# EAGLE board BSS_T10 Underboard component design (EAGLE 6.5.0)
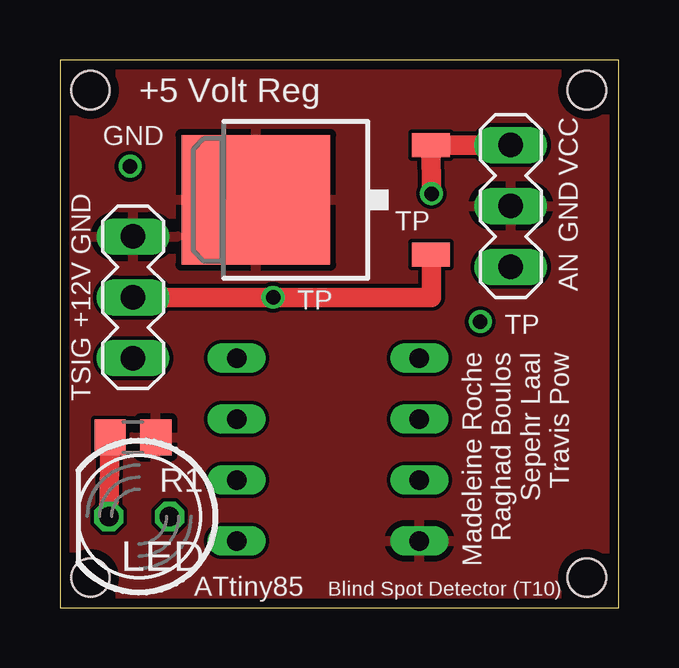
[diagram p0: board, top side]
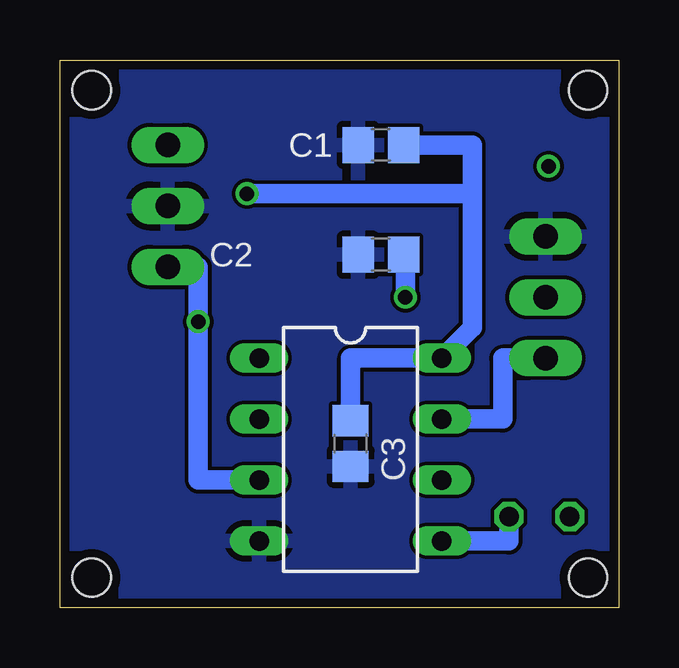
[diagram p1: board, bottom side, seen from below]

Size 23.29 x 22.85 mm. Coordinates in mm from the lower left corner, seen from the top.
Outline: 0,0 23.29,0 23.29,22.85 0,22.85 0,0
Copper layers (1*16): Top 0.0356mm / dielectric 1.5011mm / Bottom 0.0356mm
Design rules "LaenPCBOrder": minimum track width 6mil, minimum drill 13mil, track to track 6mil, track to pad 6mil, pad to pad 6mil, via to via 6mil, smd to smd 6mil, copper to edge 15mil, drill to drill 6mil, minimum pad ring 7mil, minimum via ring 7mil, stop-mask expansion 3mil, vias tented up to drill 0mil, thermal gap 10mil
Holes 1.6 mm at 1.27,1.27 1.27,21.59 21.97,21.59 21.97,1.27

## Footprints (pad centres in the part's own frame; a part is rotated, then mirrored left to right if it is on the bottom)
DIL08 = drill 0.813 long: 1 -3.81,-3.81; 2 -1.27,-3.81; 3 1.27,-3.81; 4 3.81,-3.81; 5 3.81,3.81; 6 1.27,3.81; 7 -1.27,3.81; 8 -3.81,3.81
C0805 = smd 1.3 x 1.5: 1 -0.95,0; 2 0.95,0
TO252 = smd 1 x 1.6: 1 -2.28,-4.8; 2 2.28,-4.8 | smd 5.4 x 6.2: 3 0,2.5
LED5MM = drill 0.813 octagon: A -1.27,0; K 1.27,0
R0805 = smd 1.3 x 1.5: 1 -0.95,0; 2 0.95,0
MA03-1 = drill 1.016 long: 1 -2.54,0; 2 0,0; 3 2.54,0

## Placement (x,y rotation side)
AVR  TINY13-20PU  [DIL08]  11.18,6.6 270 bottom
C1  .1uF  [C0805]  9.91,19.3 180 bottom
C2  .1uF  [C0805]  9.91,14.73 180 bottom
C3  .1uF  [C0805]  11.18,6.86 270 bottom
IC1  7805DT  [TO252]  10.67,17.02 90 top
LED  [LED5MM]  3.3,3.81 180 top
R1  1k  [R0805]  3.05,7.11 180 top
TO_SEN  MA03-1  [MA03-1]  18.8,16.76 90 top
VOLT_IN  MA03-1  [MA03-1]  3.05,12.95 270 top

## Library data of the parts
AVR = atmel; MPN: ATTINY13-20PU; OC_FARNELL: 9171550; OC_NEWARK: 96K6521
C1-C3 R1 = rcl
IC1 = linear
LED = led
TO_SEN VOLT_IN = con-lstb; OC_FARNELL: unknown; OC_NEWARK: unknown

## Nets
12VBATTERY: C2.1 IC1.1 VOLT_IN.2
+5V: AVR.8 C1.1 C3.1 IC1.2 TO_SEN.3
GND: AVR.4 C1.2 C2.2 C3.2 IC1.3 R1.1 TO_SEN.2 VOLT_IN.1
N$1: AVR.3 TO_SEN.1
N$4: AVR.5 LED.A
RLED: LED.K R1.2
TSIG: AVR.7 VOLT_IN.3

## Tracks (layer width: path | path; a pad name or v marks a point on that pad's centre or on a via)
12VBATTERY  (via drill 0.6)
  Top 0.813: VOLT_IN.2 v8.89,12.95 15.49,12.95 15.49,14.74 IC1.1
  Bottom 0.813: C2.1 8.89,14.73 v8.89,12.95
+5V  (via drill 0.6)
  Top 0.813: v15.49,17.27 IC1.2 TO_SEN.3
  Bottom 0.813: C1.1 6.1,19.3 6.1,17.27 | v15.49,17.27 6.1,17.27 | C3.1 11.18,10.41 AVR.8 6.1,11.68 6.1,17.27
GND
  pour Top: 0,22.86 23.37,22.86 23.37,0 0,0
  pour Bottom: 0,23.11 23.11,22.86 23.11,0 0,0.25
N$1  (via drill 0.6)
  Bottom 0.813: TO_SEN.1 17.53,14.22 v17.53,11.94 17.53,5.33 AVR.3
N$3  (via drill 0.6)
  other vias: 2.92,18.41
N$4
  Bottom 0.813: LED.A 4.57,2.79 AVR.5
RLED
  Top 0.813: LED.K R1.2
TSIG
  Bottom 0.813: VOLT_IN.3 4.83,10.41 4.83,7.87 AVR.7

## Text on the board
tNames: +5 Volt Reg | GND | VCC | TP | GND | GND | AN | TP | +12V | TP | Madeleine Roche / Raghad Boulos / Sepehr Laal / Travis Pow | TSIG | LED | ATtiny85 | Blind Spot Detector (T10)